# Altium PCB PCB1.PcbDoc
Units mil, origin at the board's own origin, x right, y up, seen from the top; angles counter-clockwise.
Board outline 3937.01 x 3937.01 mil, 2 copper layers (Top Layer, Bottom Layer); 28 components, 27 nets, 141 pads, 82 vias.
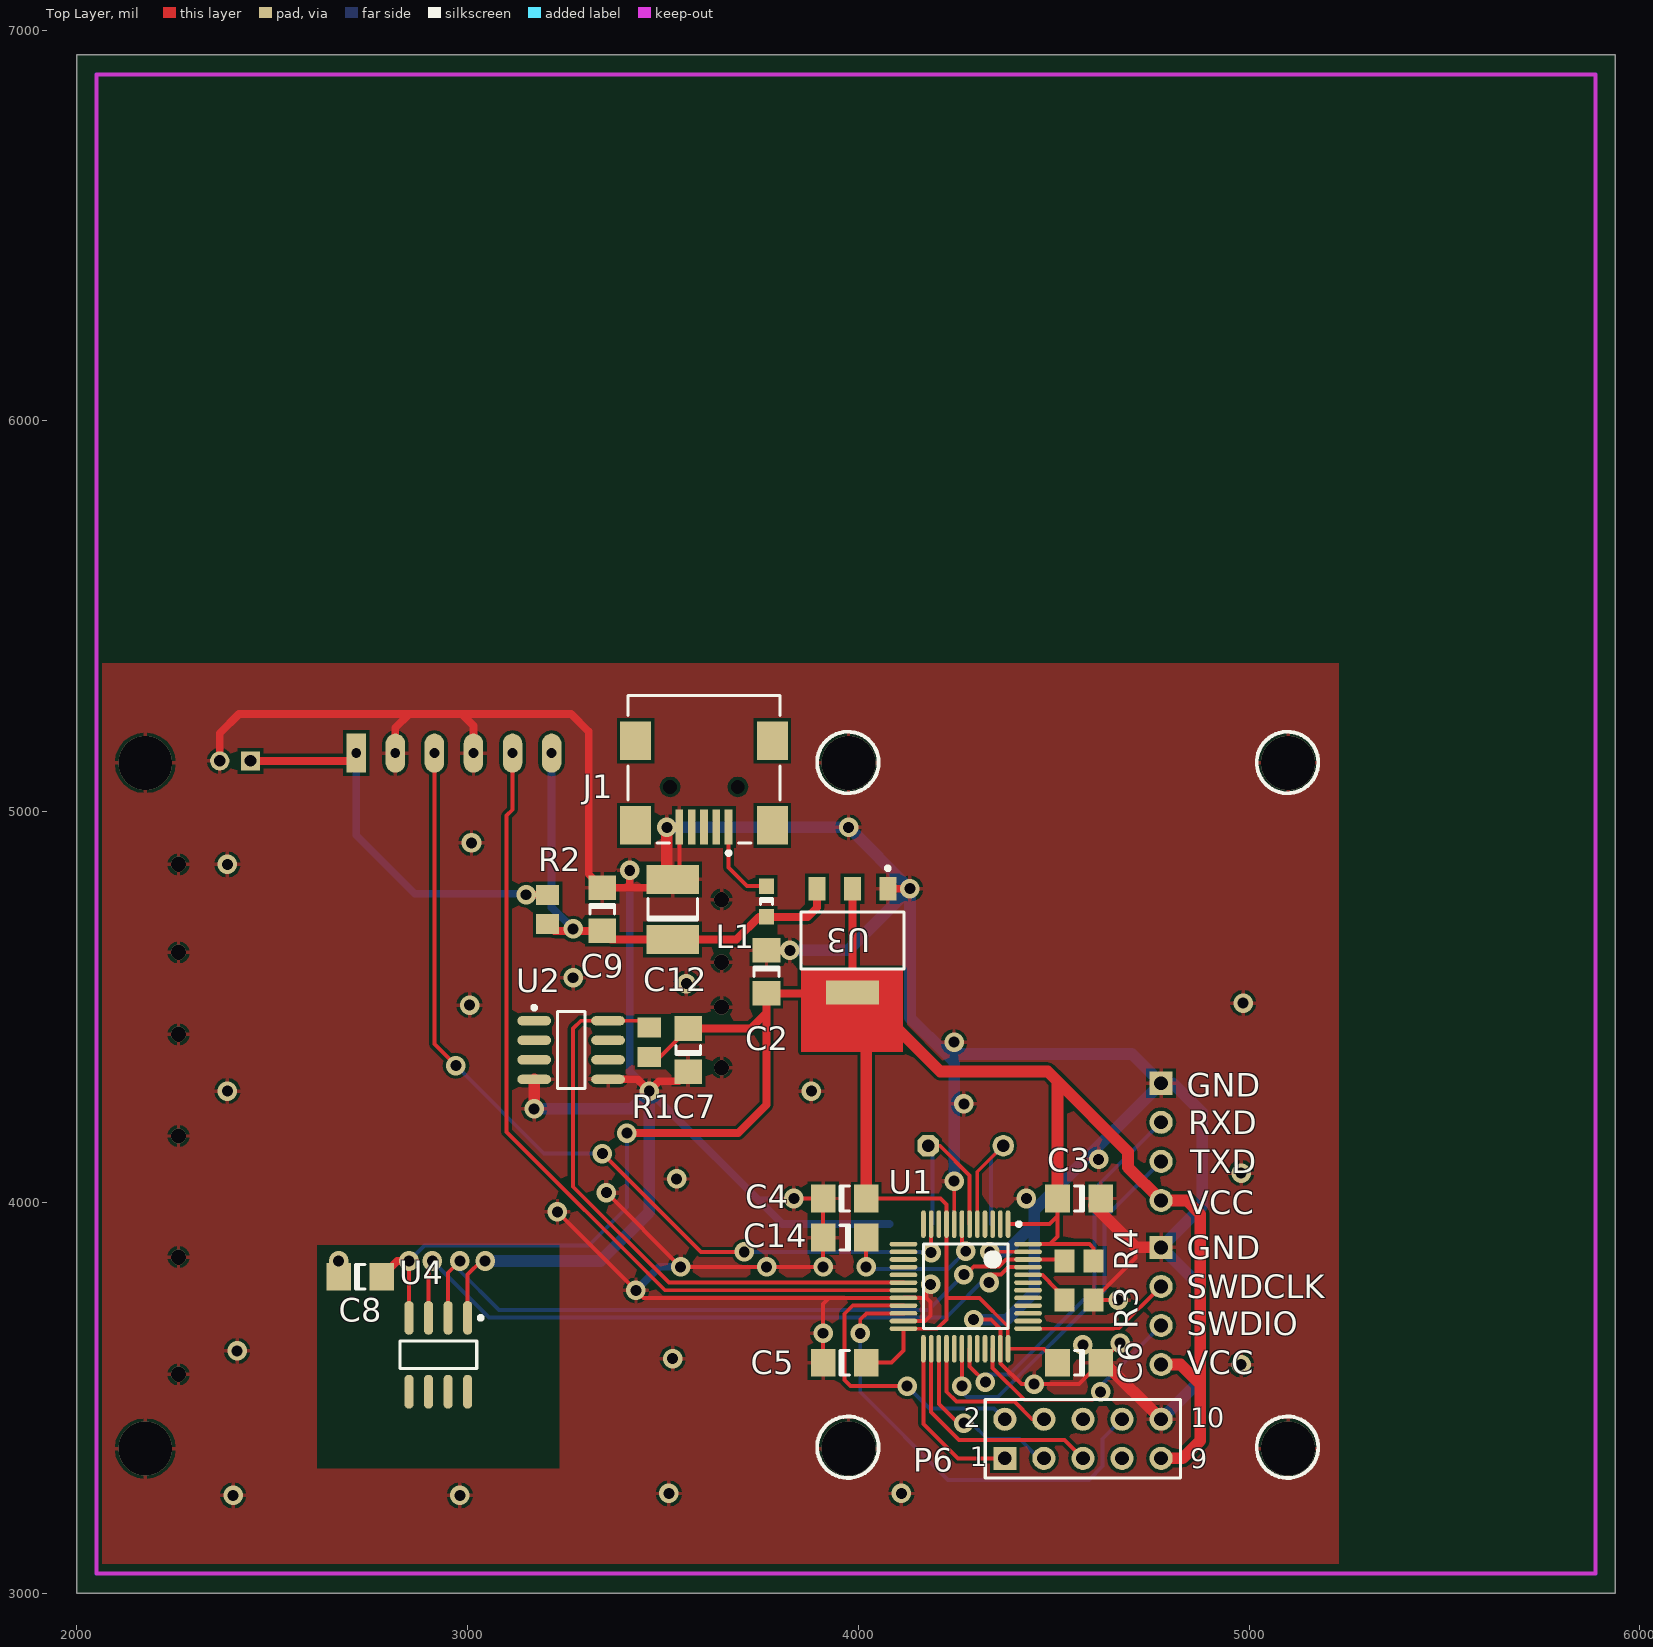
[diagram p0: Top Layer view]
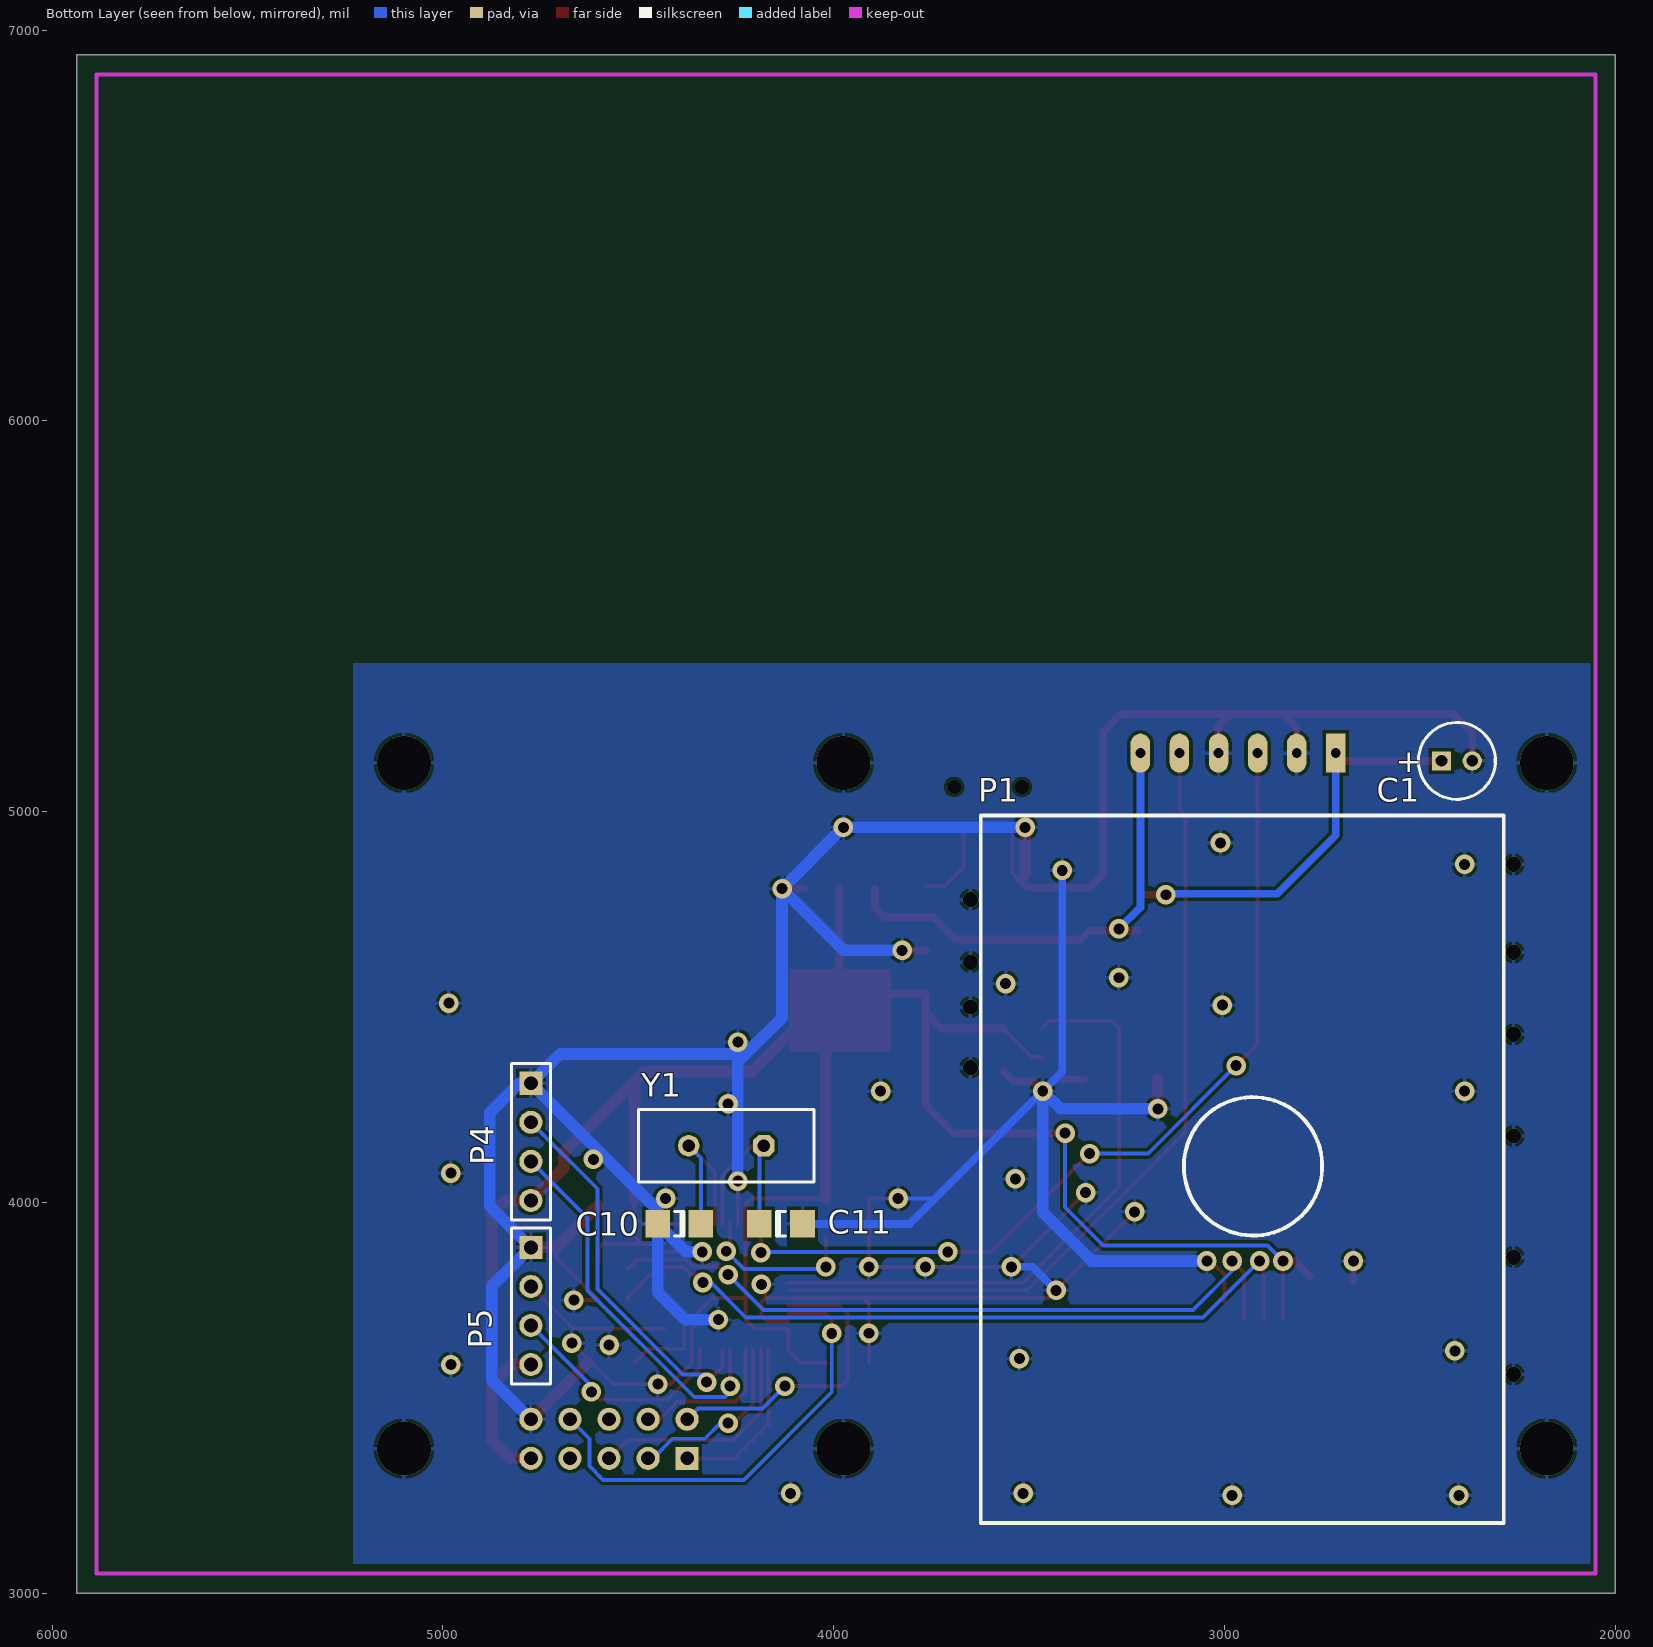
[diagram p1: Bottom Layer view, seen from below]

## Layer stack, top to bottom
Top Layer: signal copper 1.4
Dielectric: dielectric 12.6, FR-4, Dk 4.8
Bottom Layer: signal copper 1.4

## Board outline
2000,3000 5937.01,3000 5937.01,6937.01 2000,6937.01

## Design rules (kind name [scope] priority, off if disabled: settings)
Clearance [All] p1: gap=8
ComponentClearance [All] p1: gap=0 collisioncheckmode=3 verticalgap=0 showdistances=FALSE
DiffPairsRouting [All] p1: maxlimit=10 minlimit=10 mostfreqgap=10 maxuncoupledlength=500
HoleSize [All] p1: absolutevalues=TRUE maxlimit=157.48 minlimit=1 maxpercent=80.000 minpercent=20.000
MinimumSolderMaskSliver [All] p1: minsoldermaskwidth=0
PolygonConnect [All] p1: connectstyle=Relief reliefconductorwidth=10 reliefentries=4 polygonreliefangle="90 Angle"
RoutingVias [All] p1: holewidth=25 width=40 viastyle="Through Hole" minholewidth=28 minwidth=50 maxholewidth=157.48 maxwidth=157.48
SilkToSilkClearance [All] p1: silktosilkclearance=6
SilkscreenOverComponentPads [All] p1: minsilkscreentomaskgap=7
SolderMaskExpansion [All] p1: expansion=4
TestPointUsage [All] p1: valid=0 allowmultiple=FALSE
Testpoint [All] p1: side=15 testpointundercomponent=TRUE minsize=40 maxsize=100 preferedsize=60 minholesize=0 maxholesize=40 preferedholesize=32 testpointgrid=1 style=1023 order=0123456789
Width Width_pwr [All] p1: maxlimit=30 minlimit=10 preferedwidth=20
Width [All] p2: maxlimit=30 minlimit=8 preferedwidth=8
18 further rules are at their usual default settings.

## Classes and differential pairs
differential pair USB: +USB_P -USB_N

## Components (designator, comment, footprint, x,y, rotation, side; value= is the part's Value field where it differs from the comment)
C1 "Cap Pol1" B 2404.96,5130 r180 bottom
C2 "Cap Semi" C1206 3765,4590 r270 top
C3 "Cap Semi" C1206 4565,4010 r180 top
C4 "Cap Semi" C1206 3965,4010 r0 top
C5 "Cap Semi" C1206 3965,3590 r0 top
C6 "Cap Semi" C1206 4565,3590 r180 top
C7 "Cap Semi" C1206 3565,4390 r90 top
C8 "Cap Semi" C1206 2725,3810 r0 top
C9 "Cap Semi" C1206 3345,4750 r270 top
C10 "Cap Semi" C1206 4395,3945 r0 bottom
C11 "Cap Semi" C1206 4135,3945 r180 bottom
C12 "Cap Pol3" 1812 3525,4750 r90 top
C14 "Cap Semi" C1206 3965,3910 r180 top
J1 "440479-1" 440479 3605,5270 r90 top
L1 "Inductor" 2012_Chip 3765,4770 r270 top
P1 "GP2Y1010" GP2Y1010AU0F 2285,4990 r270 bottom
P4 "Header 4" HDR1X4 4775,4305 r270 bottom
P5 "Header 4" HDR1X4 4775,3885 r270 bottom
P6 "ENC28J60" ENC28J60BOARD 4375,3345 r0 top
R1 "Res3" 2012[0805] 3465,4410 r270 top
R2 "Res3" 2012[0805] 3205,4750 r270 top
R3 "Res3" 2012[0805] 4565,3750 r180 top
R4 "Res3" 2012[0805] 4565,3850 r0 top
U1 "STM32F103C8T6" LQFP48_N 4275,3785 r270 top
U2 "LM385M 1.2" D008_N 3265,4390 r0 top
U3 "REG1117-3.3" ZZ311 3985,4670 r180 top
U4 "SHT10" SOIC127P600-8N 2925,3610 r270 top
Y1 "8M" BCY-W2/E4.7 4275,4145 r0 bottom

## Footprints (in the part's own frame and the unit in brackets; to place one, negate y for a bottom-side part, rotate by r counter-clockwise, add the part's x,y. Pads: shape width x height; smd on the part's side, far side on the other; paste and mask are expansions set on the pad)
1812 [mm] "Chip Capacitor; Body 4.5 x 3.2 mm (LxW typ)"
  rect 1.9x3.4 smd: 1(-1.95,0) 2(1.95,0)
  silkscreen extent -0.7,-1.6 0.7,1.6
2012[0805] [mm] "Chip Resistor; Body 2.0 x 1.3 mm (LxW typ)"
  rect 1.3x1.5 smd: 1(-0.95,0) 2(0.95,0)
2012_Chip [mm] "2012 Chip; Chip Inductor; Body 2.0 x 1.2 mm (LxW typ)"
  rect 1x1 smd: 1(-1,0) 2(1,0)
  silkscreen extent -0.2,-0.4 0.2,0.4
440479 [mm] "Connector; USB2.0, Type AB, SM; 5 Position; Right Angle"
  rect 2.3x0.5 smd: 1(-7.85,-1.6) 2(-7.85,-0.8) 3(-7.85,0) 4(-7.85,0.8) 5(-7.85,1.6)
  rect 2.5x2 smd: 6(-7.75,4.45) 7(-2.25,4.45) 8(-7.75,-4.45) 9(-2.25,-4.45)
  round 0.6 hole 0.9 unplated: MH1(-5.25,2.2) MH2(-5.25,-2.2)
  silkscreen extent -9.67,-4.95 0.7,4.95
B [mm] "Capacitor, Electrolytic, Radial; Body 5 x 6.8 mm (Dia.xH typ); Pin Spacing 2 mm (typ)"
  rect 1.25x1.25 hole 0.75: 1(-1,0)
  round 1.25 hole 0.75: 2(1,0)
  silkscreen extent -2.5,-2.5 2.5,2.5
BCY-W2/E4.7 [mm] "Quartz Crystal, Thru-Hole; 2 Leads; Body 11.35 x 4.65 x 13.46 mm (LxWxH max)"
  oct 1.4x1.4 hole 0.8: 1(-2.44,0)
  round 1.4 hole 0.8: 2(2.44,0)
  silkscreen extent -5.7,-2.35 5.7,2.35
C1206 [mm] "Chip Capacitor; Body 3.2 x 1.6 mm (LxW typ)"
  rect 1.6x1.8 smd: 1(-1.4,0) 2(1.4,0)
  silkscreen extent -0.3,-0.8 0.3,0.8
D008_N [mm] "SOIC, 8-Leads, Body 4.9x3.9mm, Pitch 1.27mm, IPC Medium Density"
  oval 2.2x0.6 smd: 1(-2.4,1.905) 2(-2.4,0.635) 3(-2.4,-0.635) 4(-2.4,-1.905) 5(2.4,-1.905) 6(2.4,-0.635) 7(2.4,0.635) 8(2.4,1.905)
  silkscreen extent -2.52,-2.5 0.9,2.88, body extent -2,-2.5 2,2.5, height 1.75
ENC28J60BOARD [mm] "Connector; Header; 5x2 Position"
  rect 1.5x1.5 hole 0.9: 1(0,0)
  round 1.5 hole 0.9: 2(0,2.54) 3(2.54,0) 4(2.54,2.54) 5(5.08,0) 6(5.08,2.54) 7(7.62,0) 8(7.62,2.54) 9(10.16,0) 10(10.16,2.54)
  silkscreen extent -12.2,-1.28 20.37,47.24
GP2Y1010AU0F [mil]
  rect 100x50 hole 25: 1(-160,-430)
  oval 100x50 hole 25: 2(-160,-530) 3(-160,-630) 4(-160,-730) 5(-160,-830) 6(-160,-930)
  silkscreen extent 0,-1339 1811,0
HDR1X4 [mm] "Connector; Header; 4 Position"
  rect 1.5x1.5 hole 0.9: 1(0,0)
  round 1.5 hole 0.9: 2(2.54,0) 3(5.08,0) 4(7.62,0)
  silkscreen extent -1.27,-1.27 8.89,1.27
LQFP48_N [mm] "Thin QFP, 48-Leads, Body 7x7mm, Pitch 0.5mm, IPC Medium Density"
  oval 1.8x0.3 smd: 1(-4.05,2.75) 2(-4.05,2.25) 3(-4.05,1.75) 4(-4.05,1.25) 5(-4.05,0.75) 6(-4.05,0.25) 7(-4.05,-0.25) 8(-4.05,-0.75) 9(-4.05,-1.25) 10(-4.05,-1.75) 11(-4.05,-2.25) 12(-4.05,-2.75) 25(4.05,-2.75) 26(4.05,-2.25) 27(4.05,-1.75) 28(4.05,-1.25) 29(4.05,-0.75) 30(4.05,-0.25) 31(4.05,0.25) 32(4.05,0.75) 33(4.05,1.25) 34(4.05,1.75) 35(4.05,2.25) 36(4.05,2.75)
  oval 0.3x1.8 smd: 13(-2.75,-4.05) 14(-2.25,-4.05) 15(-1.75,-4.05) 16(-1.25,-4.05) 17(-0.75,-4.05) 18(-0.25,-4.05) 19(0.25,-4.05) 20(0.75,-4.05) 21(1.25,-4.05) 22(1.75,-4.05) 23(2.25,-4.05) 24(2.75,-4.05) 37(2.75,4.05) 38(2.25,4.05) 39(1.75,4.05) 40(1.25,4.05) 41(0.75,4.05) 42(0.25,4.05) 43(-0.25,4.05) 44(-0.75,4.05) 45(-1.25,4.05) 46(-1.75,4.05) 47(-2.25,4.05) 48(-2.75,4.05)
  silkscreen extent -4.17,-2.75 2.75,3.58, body extent -3.5,-3.5 3.5,3.5, height 1.6
SOIC127P600-8N [mm] "SOIC, 8-Leads, Body 4.9x3.9mm, Pitch 1.27mm, IPC Medium Density"
  oval 2.2x0.6 smd: 1(-2.4,1.905) 2(-2.4,0.635) 3(-2.4,-0.635) 4(-2.4,-1.905) 5(2.4,-1.905) 6(2.4,-0.635) 7(2.4,0.635) 8(2.4,1.905)
  silkscreen extent -2.52,-2.5 0.9,2.88, body extent -2,-2.5 2,2.5, height 1.75
ZZ311 [mm] "SOT-223/SC-73; 4 Leads; Body 6.7 x 7.3 mm, inc. leads (LxW max)"
  rect 1.1x1.55 smd: 1(-2.3,-3.375) 2(0,-3.375) 3(2.3,-3.375)
  rect 3.45x1.55 smd: 4(0,3.375)
  silkscreen extent -3.35,-4.82 3.35,1.85

## Part data
C1: "Polarized Capacitor (Radial)"
C2 C3 C4 C5 C6 C7 C8 C9 C10 C11 C14: "Capacitor (Semiconductor SIM Model)"
C12: "Polarized Capacitor (Surface Mount)"
J1: "USB 2.0, Right Angle, SMT, AB Type, Receptacle, 5 Position, Black"
P1: library part "Header 6", "Header, 6-Pin"
P4 P5: "Header, 4-Pin"
P6: library part "Header 5X2", "Header, 5-Pin, Dual row"
R1 R2 R3 R4: "Resistor"
U1: "STM32 ARM-based 32-bit MCU with 64 Kbytes Flash, 48-pin LQFP, Industrial Temperature"
U2: library part LM385D-2.5, "Micropower Voltage Reference"
U3: "800mA and 1A Low Dropout Positive Regulator 2.85V, 3.3V, 5V, and Adjustable"
Y1: library part XTAL, "Crystal Oscillator"

## Via types
v1: diameter 50, hole 28, Top Layer to Bottom Layer, 66 vias
v2: diameter 39.37, hole 39.37, Top Layer to Bottom Layer, 10 vias
v3: diameter 137.8, hole 137.79, Top Layer to Bottom Layer, 6 vias

## Nets (pads, with @x,y where several pads share a name; then routed paths per layer and width w, separated by ;. In a path a pad name is that pad's centre, name@x,y a point inside that pad or via, vN(x,y) a via of type N, cw(c..) or ccw(c..) an arc to the next point about the centre after c; other vN are vias at no path point)
5V: C9.2 C12.1 L1.2 P1.6 R2.2 U3.3 | length 1235.6
  Top Layer w20: R2.2@3222.72,4694.88 C9.2 3366.65,4673.23 C12.1 3688.23,4673.23 3745.63,4730.63 L1.2 3870.63,4730.63 3894.45,4754.45 U3.3
  Bottom Layer w20: P1.6 3215,4755 v1(3270,4700)
ETH_CS: P6.1 U1.25 | length 437.1
  Top Layer w10: U1.25 4166.73,3433.27 4255,3345 P6.1
ETH_INT: P6.8 U1.22 | length 1170.6
  Top Layer w10: v1(4005,3665) 4005,3700 4021.1,3716.1 U1.22
  Bottom Layer w10: v1(4005,3665) 4005,3515 4230,3290 4590,3290 4625,3325 4625,3395 P6.8
ETH_RST: P6.2 U1.21 | length 780.6
  Top Layer w10: U1.21 3985.79,3735.79 3965,3715 3965,3545 3980,3530 v1(4125,3530)
  Bottom Layer w10: v1(4125,3530) 4182,3473 4347,3473 P6.2
ETH_SCK: P6.5 U1.26 | length 600
  Top Layer w10: U1.26 4186,3625.13 4186,3464 4258,3392 4528,3392 P6.5
ETH_SI: P6.4 U1.28 | length 388.5
  Top Layer w10: U1.28 4225.79,3515.47 4251.26,3490 4400,3490 4445,3445 P6.4
ETH_SO: P6.3 U1.27 | length 472.2
  Top Layer w10: U1.27 4206.1,3483.9 4260,3430 4265,3430 v1(4270,3435)
  Bottom Layer w10: v1(4270,3435) 4290,3435 4330,3395 4412.05,3395 4462.05,3345 P6.3
ETH_WOL: P6.6
GND: C1.2 C2.1 C3.1 C4.1 C5.1 C6.1 C7.1 C8.1 C9.1 C10.2 C11.2 C12.2 C14.2 J1.5 P1.2 P1.4 P4.1 P5.1 P6.10 R3.1 U1.8 U1.20 U1.23 U1.35 U1.47 U2.4 U2.5 U3.1 U4.1 | length 13612.6
  Top Layer w10: U4.1@3000,3745 3000,3815 3035,3850 v1(3045,3850) ; v1(3230,3975.94) v1(3430.94,3775) 3450.47,3755.47 3925.47,3755.47 ; v1(3355.24,4025) v1(3545.12,3835.12) v1(3765.12,3835.12) v1(3909.88,3835.12) C14.2 C4.1 v1(3835,4010) ; C12.2 3542.01,4843.78 J1.5 ; C5.1 v1(3909.88,3665.12) 3909.88,3739.88 3925.47,3755.47 ; U1.23 4171.42,3696.42 4185,3710 4185,3745 4174.53,3755.47 ; v1(4185,3790) 4174.53,3779.53 4174.53,3755.47 ; U1.8 v1(4245.47,4054.53) ; v1(4295,3700) 4340,3700 4363.58,3676.42 U1.35 4364.36,3624.77 4364.36,3588.19 4417.55,3535 4565.12,3535 C6.1 v1(4670,3639.88) ; v1(4336.42,3873.58) U1.47 ; v1(4665,3750) R3.1 4709.68,3857.28 4709.68,3885 ; 3925.47,3755.47 U1.20 4174.53,3755.47
  Top Layer w20: C1.2 2365.59,5200.59 2415,5250 2850,5250 ; C8.1@2669.88,3800 2670,3800.12 v1(2670,3850) ; P1.2 2815,5215 2850,5250 ; P1.4 3015,5220 2985,5250 ; U2.5 3435,4315 v1(3465,4285) 3490,4310 3540.12,4310 C7.1 ; v1(3415,4850) 3415,4805.12 ; C12.2 3503.35,4805.12 3415,4805.12 ; C2.1 v1(3824.88,4645.12) ; U3.1 v1(4132.13,4802.87) ; 2850,5250 2985,5250 ; 2985,5250 3265,5250 3310,5205 3310,4840.12 C9.1 3415,4805.12
  Top Layer w30: v1(3170.51,4239.49) U2.4 ; C12.2@3510,4841.77 v1(3510,4960) ; C3.1@4602.4,3992.28 4709.68,3885 P5.1 ; C6.1@4630,3590 P6.10
  Bottom Layer w10: 3742.19,4010 v1(3835,4010)
  Bottom Layer w20: v1(3415,4850) 3415,4335 v1(3465,4285) 3805,3945 C11.2 ; v1(3430.94,3775) 3491.06,3835.12 v1(3545.12,3835.12)
  Bottom Layer w30: v1(3045,3850) 3340,3850 3465,3975 v1(3465,4285) 3419.49,4239.49 v1(3170.51,4239.49) ; v1(3510,4960) v1(3975,4960) v1(4132.13,4802.87) ; v1(3824.88,4645.12) 3974.37,4645.12 v1(4132.13,4802.87) ; v1(4245.47,4054.53) 4245.47,4359.53 4225,4380 ; v1(4295,3700) 4380,3700 4450.12,3770.12 C10.2 ; v1(4336.42,3873.58) 4378.7,3873.58 C10.2 ; P6.10 4875,3545 4875,3785 P5.1 4880,3990 4880,4230 4805,4305 P4.1 ; v1(4132.13,4802.87) 4132.13,4472.87 4225,4380 ; 4225,4380 4700,4380 P4.1 ; C10.2 4450.12,3980.12 P4.1
  other v1: 2400,3250 2980,3250 3515,3255 4110,3255 4450,3535 4980,3585 3525,3600 2410,3620 4575,3635 4430,4010 3535,4060 4980,4075 4615,4110 4270,4252.35 2385,4285 3880,4285 4245,4410 3005,4505 4985,4510 3560,4560 3270,4575 2385,4865 3010,4920
  other v2: 2260,3560 2260,3860 2260,4170 3650,4345 2260,4430 3650,4500 3650,4615 2260,4640 3650,4775 2260,4865
  other v3: 2175,3370 3975,3370 5100,3370 2175,5125 3975,5125 5100,5125
NetC1_1: C1.1 P1.1 R2.1 | length 1042.4
  Top Layer w20: C1.1 2695,5130 P1.1 ; v1(3150,4787.4) R2.1
  Bottom Layer w20: P1.1 2715,4940 2865,4790 3147.83,4790 3150,4787.83 v1(3150,4787.4)
NetC10_1: C10.1 U1.5 Y1.2 | length 441
  Top Layer w10: U1.5 4304.53,4078.46 Y1.2
  Bottom Layer w10: C10.1 4339.88,4113.82 Y1.2
NetC11_1: C11.1 U1.6 Y1.1 | length 466.5
  Top Layer w10: Y1.1 4208.74,4145 4284.84,4068.9 U1.6
  Bottom Layer w10: Y1.1 4190.12,4133.82 C11.1
NetC14_1: C14.1 U1.7 | length 424.3
  Top Layer w10: v1(4020,3835) 4020,3909.88 C14.1 ; U1.7 4265.16,3884.84 v1(4275,3875)
  Bottom Layer w10: v1(4020,3835) 4025,3830 4230,3830 v1(4275,3875)
NetJ1_1: J1.1 L1.1 | length 220.7
  Top Layer w10: J1.1 3667.99,4857.01 3715.63,4809.37 L1.1
NetP5_2: P5.2 U1.37 | length 385.4
  Top Layer w10: U1.37 4653.11,3676.73 4654.26,3677.88 4667.88,3677.88 P5.2
NetP5_3: P5.3 U1.34 | length 597.2
  Top Layer w10: U1.34 4343.9,3576.1 4425,3495 4600,3495 v1(4620,3515)
  Bottom Layer w10: v1@4612.5,3522.5 P5.3
NetR3_2: R3.2 U1.44 | length 124.5
  Top Layer w10: U1.44 4435.23,3813.75 4471.81,3813.75 4489.01,3796.55 4489.01,3795.09 4527.6,3756.5 R3.2
REF: R1.1 U1.18 U2.8 | length 1562.7
  Top Layer w10: R1.1 3447.4,4465 U2.8 3290,4465 3270,4445 3270,4040 3515.16,3794.84 U1.18
RXD: P4.2 U1.31 | length 990.7
  Top Layer w10: U1.31 4284.84,3580.16 v1(4325,3540)
  Bottom Layer w10: v1(4325,3540) 4320,3545 4320,3550 4330,3560 4386.26,3560 4605,3778.74 4605,4035 P4.2
SENSORDRIVE: P1.3 U1.11 | length 2310.5
  Top Layer w10: P1.3 2915,4405 v1(2970,4350) ; v1(3345,4125) 3596.88,3873.12 v1(3708.12,3873.12) ; v1(4186.42,3871.42) U1.11
  Bottom Layer w10: v1(2970,4350) 3195,4125 v1(3345,4125) ; v1(3708.12,3873.12) 4184.72,3873.12 v1(4186.42,3871.42)
SENSOROUTPUT: P1.5 U1.19 | length 2159.5
  Top Layer w10: P1.5 3115,5005 3100,4990 3100,4180 3504.84,3775.16 U1.19
SHT_DATA: R4.1 U1.46 U4.2 | length 1835.2
  Top Layer w10: U4.2 2950,3820 v1(2980,3850) ; v1(4270,3815) 4275,3815 4295.58,3835.58 4360,3835.58 4378.31,3853.9 U1.46 4503.7,3853.9 R4.1@4527.6,3830
  Bottom Layer w10: v1(2980,3850) 2980,3825 3080,3725 4180,3725 v1(4270,3815)
SHT_SCK: U1.45 U4.3 | length 1827.7
  Top Layer w10: U4.3 2900,3840 v1(2910,3850) ; v1(4335,3795) 4335,3815 4365,3815 4384.21,3834.21 U1.45
  Bottom Layer w10: v1(2910,3850) 3055,3705 4225,3705 4335,3815 v1(4335,3795)
TXD: P4.3 U1.30 | length 984.1
  Top Layer w10: v1(4265,3530) 4265.16,3530.16 U1.30
  Bottom Layer w10: v1(4265,3530) 4265,3515 4278,3502 4357,3502 4630,3775 4630,3960 P4.3
USB_N: J1.2
USB_P: J1.3
VCC: C2.2 C3.2 C4.2 C5.2 C6.2 C7.2 C8.2 P4.4 P5.4 P6.9 R1.2 R4.2 U1.1 U1.9 U1.24 U1.36 U1.48 U3.2 U3.4 U4.4 | length 6988.1
  Top Layer w10: U4.4 v1(2850,3850) ; R1.2 3492.48,4372.6 C7.2 ; C5.2 4085,3590 4115.55,3620.55 U1.24 4201.73,3676.73 4225.79,3700.79 U1.9 4225.79,3994.21 4210,4010 C4.2 ; 4230,3755 4310.46,3755 4382.49,3682.97 4382.49,3626.33 U1.36 4474.33,3625.55 C6.2 ; U1.1 4489.33,3944.45 4509.88,3965 ; U1.48 4490,3893.27 ; C3.2 4509.88,3965 ; R4.2 4602.4,3882.6 4591.73,3893.27 4490,3893.27 ; 4490,3893.27 4509.88,3913.15 4509.88,3965
  Top Layer w20: C8.2 2820.12,3850 v1(2850,3850) ; v1(3407.5,4177.5) 3692.5,4177.5 3765,4250 3765,4485 ; C7.2 3725.12,4445.12 3765,4485 ; U3.2 U3.4 3982.76,4534.88 C2.2 3765,4485
  Top Layer w30: C4.2 4020.12,4502.01 U3.4 4007.87,4537.13 4210,4335 4485,4335 4509.88,4310.12 ; C3.2 4509.88,4310.12 ; P6.9 4830,3345 4875,3390 4875,3535 ; P5.4 4825,3585 4875,3535 ; 4509.88,4310.12 4690,4130 4690,4090 P4.4 4840,4005 4875,3970 4875,3535
  Bottom Layer w10: v1(2850,3850) 2890,3890 3310,3890 3407.5,3987.5 v1(3407.5,4177.5)
pads on no net: J1.4 J1.6 J1.7 J1.8 J1.9 J1.MH1 J1.MH2 P6.7 U1.2 U1.3 U1.4 U1.10 U1.12 U1.13 U1.14 U1.15 U1.16 U1.17 U1.29 U1.32 U1.33 U1.38 U1.39 U1.40 U1.41 U1.42 U1.43 U2.1 U2.2 U2.3 U2.6 U2.7 U4.5 U4.6 U4.7 U4.8

## Polygon pours and split planes (outlines as drawn)
GND on Top Layer "Top Layer-GND" (solid, remove dead copper, pour order 1000): 2065,5380 2065,3075 5230,3075 5230,5380
GND on Bottom Layer "GND" (solid, remove dead copper, pour order 1001): 2050,5380 2050,3075 5230,3075 5230,5380

## Keep-outs
Keep-Out Layer:
  lines w10: 2050,3050 2050,6887.01 5887.01,6887.01 5887.01,3050 2050,3050

## Other copper
Top Layer:
  rectangle net VCC: 3853.11,4385 4115,4597.17
  pour cut-out: 2615,3890 2615,3320 3235,3320 3235,3890

## Silkscreen, mask and mechanical layers (free items; w line width, h text height)
Top Overlay:
  text "GND" at 4840,4270 h60
  text "RXD" at 4845,4175 h60
  text "TXD" at 4850,4075 h60
  text "VCC" at 4842.19,3969.65 h60
  text "GND" at 4840,3855 h60
  text "SWDCLK" at 4840,3755 h60
  text "SWDIO" at 4840,3660 h60
  text "VCC" at 4840,3560 h60
Top Solder:
  rectangle: 3853.11,4385 4115,4597.17

## Text inside footprints (layer, text, board x,y; h text height)
C1: Bottom Overlay "+" at 2561.46,5100.47 h59.06
J1: Mechanical 1 "PCB Edge" at 3763.91,5287.02 h9.84 r180
P6: Top Overlay "10" at 4850,3425 h50; Top Overlay "9" at 4850,3320 h50; Top Overlay "1" at 4285,3325 h50; Top Overlay "2" at 4270,3425 h50